# EAGLE board autotest1 (EAGLE 5.07)
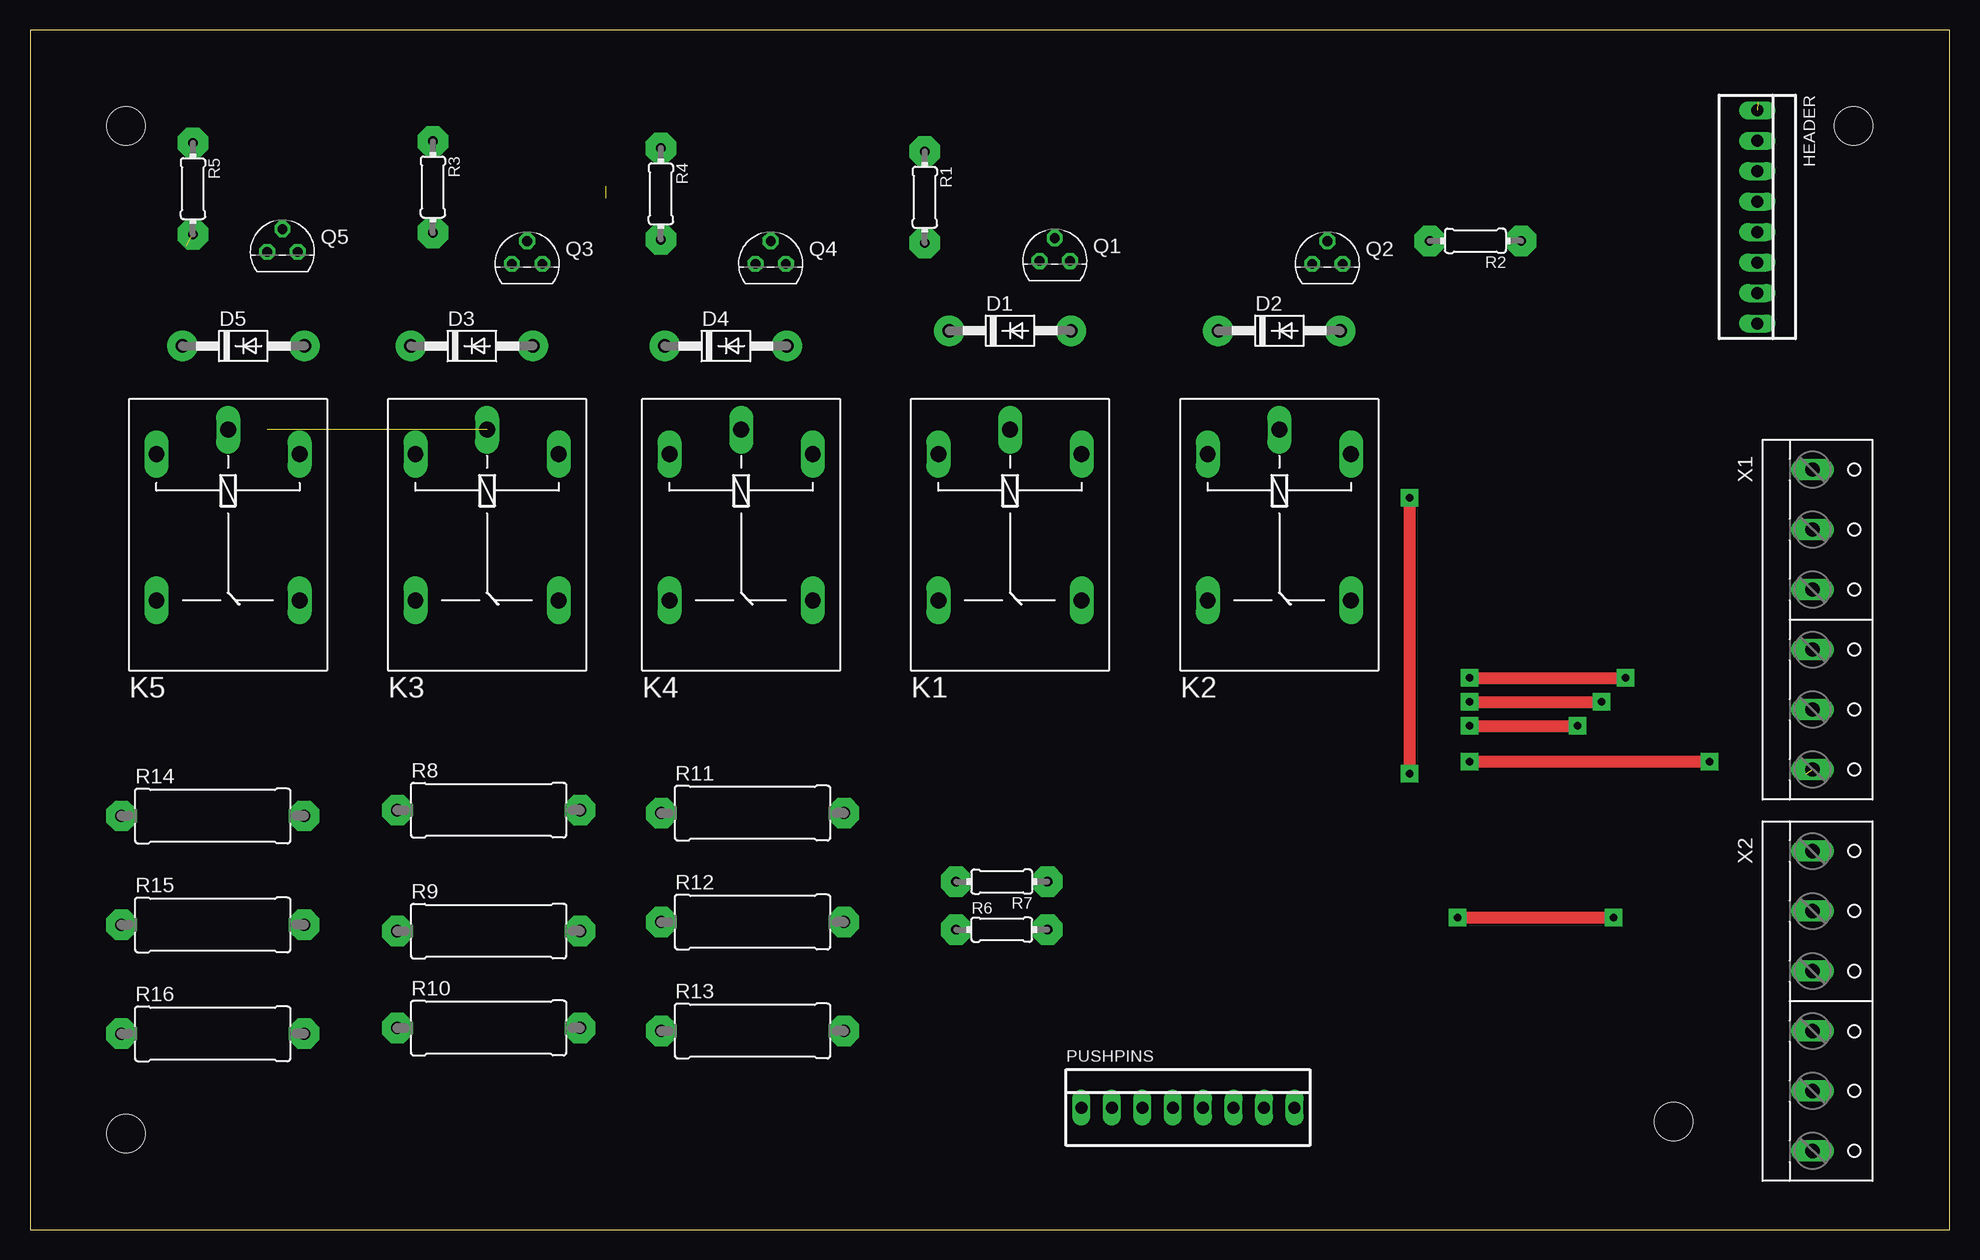
[diagram p0: board, top side]
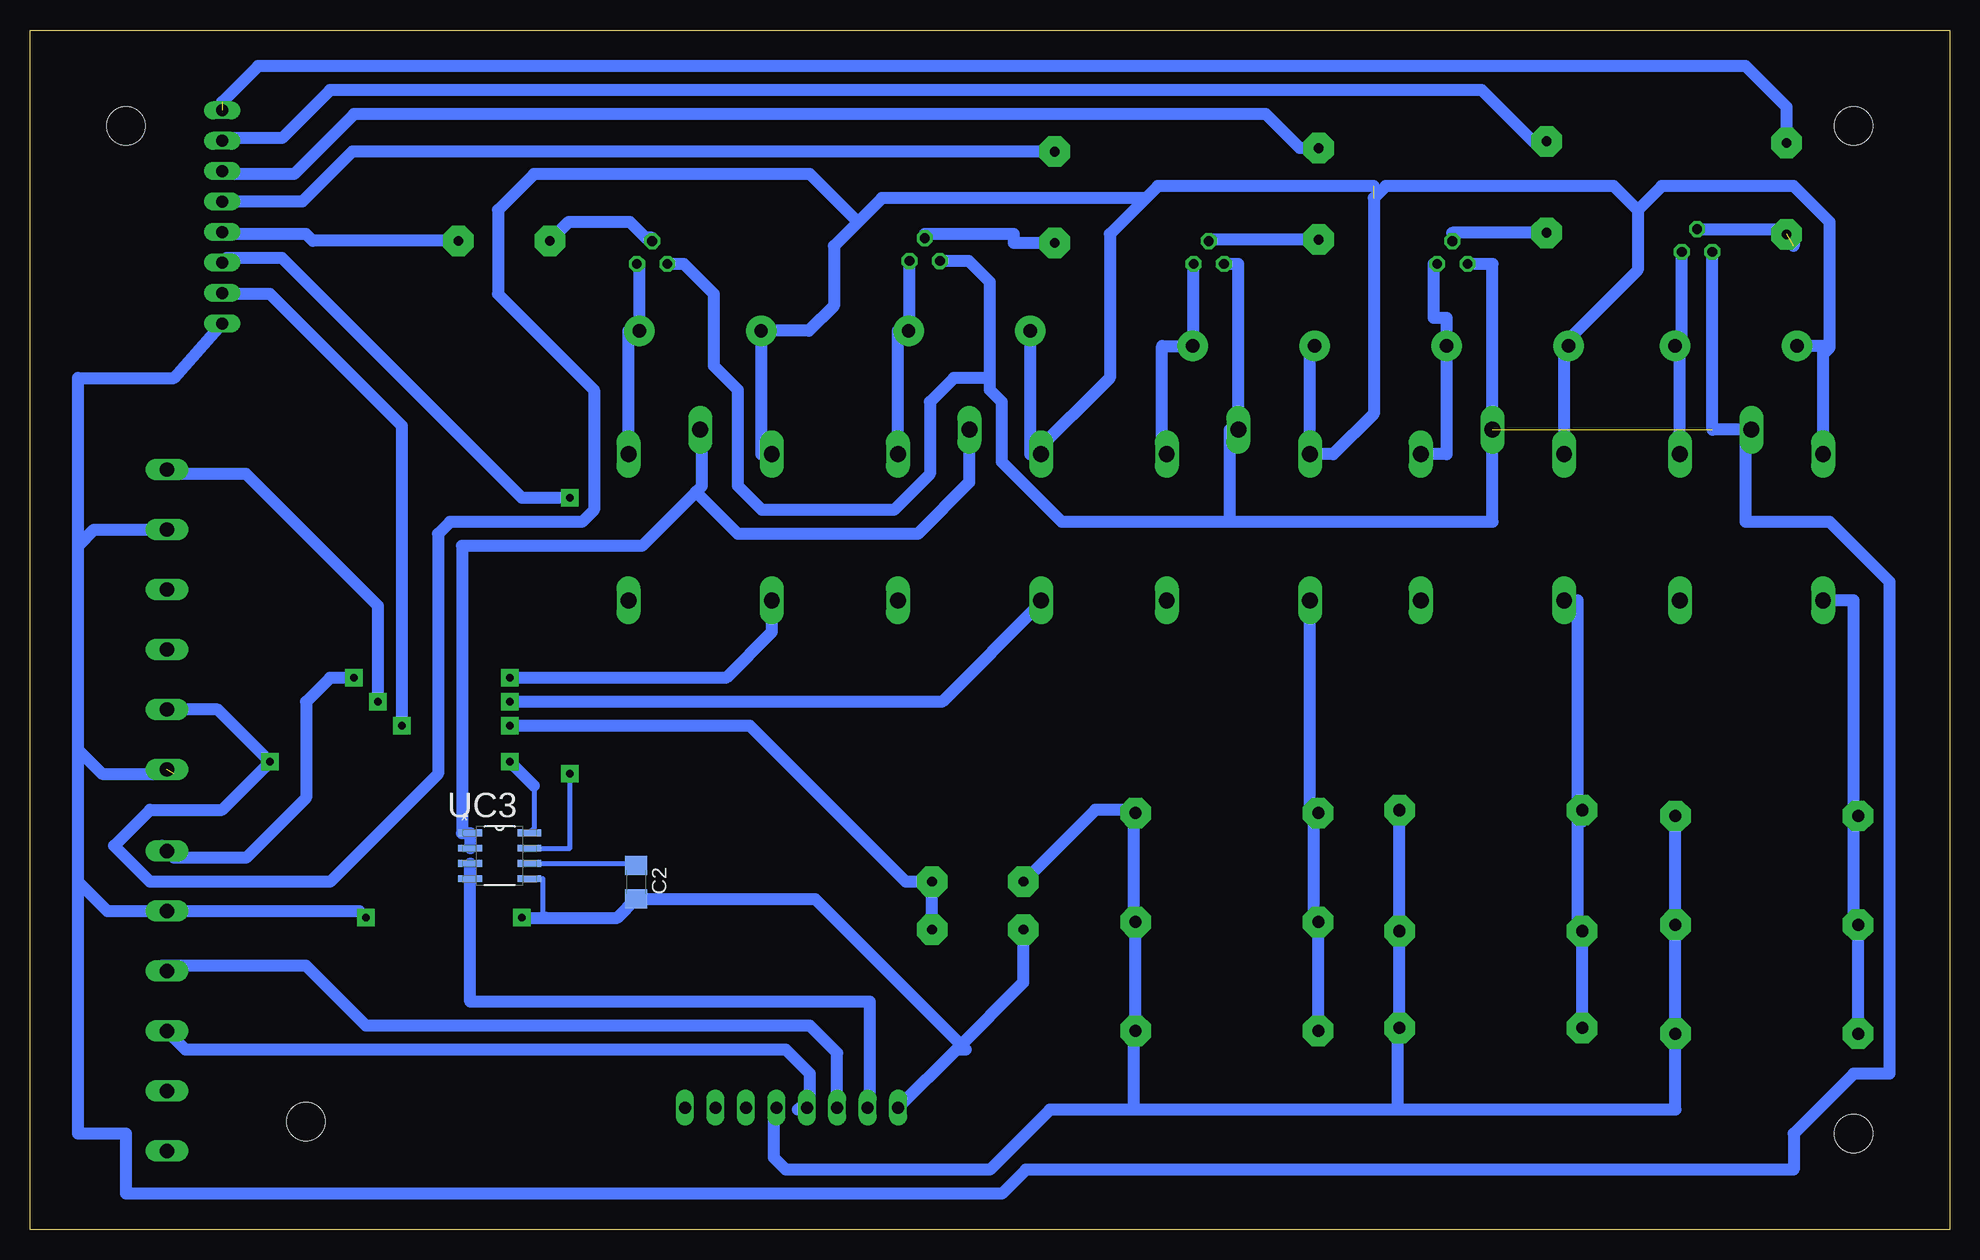
[diagram p1: board, bottom side, seen from below]

Size 160 x 100 mm. Coordinates in mm from the lower left corner, seen from the top.
Outline: 0,0 160,0 160,100 0,100 0,0
Copper layers (1*16): Top 0.035mm / dielectric 1.5mm / Bottom 0.035mm
Design rules "default": minimum track width 10mil, minimum drill 24mil, track to track 8mil, track to pad 8mil, pad to pad 8mil, via to via 8mil, smd to smd 8mil, copper to edge 40mil, drill to drill 8mil, minimum pad ring 10mil, minimum via ring 8mil, stop-mask expansion 4mil, vias tented up to drill 0mil, thermal gap 10mil
Net classes: 1 power: width 3 mm; 2 medpower: width 1 mm
Holes 3.2 mm at 8,92 8,8 137,9 152,92

## Footprints (pad centres in the part's own frame; a part is rotated, then mirrored left to right if it is on the bottom)
C1206 = smd 1.6 x 1.8: 1 -1.4,0; 2 1.4,0
DO41-10 = drill 1.118 pad 2.54 round: A 5.08,0; C -5.08,0
22-23-2081 = drill 1 long: 1 -8.89,0; 2 -6.35,0; 3 -3.81,0; 4 -1.27,0; 5 1.27,0; 6 3.81,0; 7 6.35,0; 8 8.89,0
G5LE = drill 1.321 long: 1 -7.493,-5.969; 2 -7.493,5.969; O 4.699,5.969; P -9.525,0; S 4.699,-5.969
TO92 = drill 0.813 octagon: 1 1.27,0; 2 0,1.905; 3 -1.27,0
0204/7 = drill 0.813 pad 2.54 octagon: 1 -3.81,0; 2 3.81,0
P0613/15 = drill 1.016 pad 2.54 octagon: 1 -7.62,0; 2 7.62,0
SOIC127P600X175-8N = smd 1.981 x 0.559: 1 -2.464,1.905; 2 -2.464,0.635; 3 -2.464,-0.635; 4 -2.464,-1.905; 5 2.464,-1.905; 6 2.464,-0.635; 7 2.464,0.635; 8 2.464,1.905
W237-6 = drill 1.194 long: 1 -12.5,-1.27; 2 -7.5,-1.27; 3 -2.5,-1.27; 4 2.5,-1.27; 5 7.5,-1.27; 6 12.5,-1.27

## Placement (x,y rotation side)
C2  2.2uf  [C1206]  109.48,28.96 270 bottom
D1  1N4004  [DO41-10]  81.69,74.93 0 top
D2  1N4004  [DO41-10]  104.14,74.93 0 top
D3  1N4004  [DO41-10]  36.83,73.66 0 top
D4  1N4004  [DO41-10]  58.01,73.66 0 top
D5  1N4004  [DO41-10]  17.78,73.66 0 top
HEADER  22-23-2081  [22-23-2081]  143.98,84.42 270 top
K1  G5L  [G5LE]  81.69,57.15 270 top
K2  G5L  [G5LE]  104.14,57.15 270 top
K3  G5L  [G5LE]  38.1,57.15 270 top
K4  G5L  [G5LE]  59.28,57.15 270 top
K5  G5L  [G5LE]  16.51,57.15 270 top
PUSHPINS  22-23-2081  [22-23-2081]  96.52,10.16 0 top
Q1  2N3904  [TO92]  85.42,80.74 0 top
Q2  2N3904  [TO92]  108.14,80.5 0 top
Q3  2N3904  [TO92]  41.44,80.5 0 top
Q4  2N3904  [TO92]  61.74,80.5 0 top
Q5  2N3904  [TO92]  21.04,81.5 0 top
R1  [0204/7]  74.58,86.05 270 top
R2  [0204/7]  120.48,82.42 180 top
R3  [0204/7]  33.58,86.91 270 top
R4  [0204/7]  52.58,86.34 270 top
R5  [0204/7]  13.58,86.77 270 top
R6  [0204/7]  81,25 0 top
R7  [0204/7]  81,29 180 top
R8  [P0613/15]  38.23,34.96 0 top
R9  [P0613/15]  38.23,24.88 0 top
R10  [P0613/15]  38.23,16.8 0 top
R11  [P0613/15]  60.23,34.72 0 top
R12  [P0613/15]  60.23,25.64 0 top
R13  [P0613/15]  60.23,16.56 0 top
R14  [P0613/15]  15.23,34.48 0 top
R15  [P0613/15]  15.23,25.4 0 top
R16  [P0613/15]  15.23,16.32 0 top
UC3  ACS712ELCTR-05B-T  [SOIC127P600X175-8N]  120.84,31.15 0 bottom
X1  [W237-6]  149.86,50.85 270 top
X2  [W237-6]  149.86,19.05 270 top

## Library data of the parts
C2 R1-R16 = matt rcl
D1-D5 = matt diode
HEADER PUSHPINS = con-molex
K1-K5 = relay
Q1-Q5 = matt transistor-npn
UC3 = matt-allegro; DESCRIPTION: Linear Current Sensor; MPN: ACS712ELCTR-05B-T; OC_FARNELL: 27M3644; OC_NEWARK: 1329623; PACKAGE: SOIC-8; SUPPLIER: Allegro
X1 X2 = con-wago-500

## Nets
2V-IN: K1.S X1.1
+5V: D1.C D2.C D3.C D4.C D5.C K1.1 K2.1 K3.1 K4.1 K5.1 UC3.8 X1.5
CURRENT_SENSE: HEADER.6 UC3.7
FUELCELL-INPUT: K2.S X2.1
GND: C2.2 HEADER.8 K3.P K4.P K5.P PUSHPINS.1 Q1.3 Q2.3 Q3.3 Q4.3 Q5.3 R6.1 UC3.5 X1.2 X1.6 X2.2
N$1: D1.A K1.2 Q1.1
N$2: Q1.2 R1.2
N$3: D2.A K2.2 Q2.1
N$4: Q2.2 R2.2
N$5: D3.A K3.2 Q3.1
N$6: Q3.2 R3.2
N$7: D4.A K4.2 Q4.1
N$8: Q4.2 R4.2
N$9: D5.A K5.2 Q5.1
N$10: Q5.2 R5.2
N$11: K3.S R8.1 R9.1 R10.1
N$12: C2.1 UC3.6
N$19: K4.S R11.1 R12.1 R13.1
N$20: K5.S R14.1 R15.1 R16.1
OUTPUT_V_SENSE: HEADER.7 R6.2 R7.1
PURGE+ [medpower]: PUSHPINS.3 X2.3
PURGE- [medpower]: PUSHPINS.4 X2.4
RELAY-FC: HEADER.5 R2.1
RELAY-LOAD1: HEADER.2 R3.1
RELAY-LOAD2: HEADER.3 R4.1
RELAY-LOAD3: HEADER.1 R5.1
RELAY-SUPPLY: HEADER.4 R1.1
SHIELD_INPUT [power]: PUSHPINS.2 UC3.3 UC3.4
SHIELD_OUTPUT: PUSHPINS.5 R7.2 R8.2 R9.2 R10.2 R11.2 R12.2 R13.2 R14.2 R15.2 R16.2
SUPPLY [power]: K1.P K2.P UC3.1 UC3.2

## Tracks (layer width: path | path; a pad name or v marks a point on that pad's centre or on a via)
2V-IN  (via drill 0.6 pad 1.42)
  Top 1.016: v120,44 v131,44
  Bottom 1.016: K1.S 75.72,52.28 84,44 v120,44 | v131,44 131,52 142,63 148.24,63 X1.1
+5V  (via drill 0.6 pad 1.42)  (1 unrouted)
  Top 1.016: v140,39 v120,39
  Bottom 0.406: 118,37 118,33.43 UC3.8
  Bottom 1.016: D5.C 10.54,73.66 10.54,73 | K5.1 10.54,73 | K3.1 32.13,73.66 D3.C 31.75,74.25 26,80 26,85 | 76.36,64.64 K1.1 | D1.C 76.61,64.64 76.36,64.64 | D4.C 53.31,73.66 K4.1 51.36,64.64 48,68 48,86 47,87 28,87 26,85 | K2.1 99.06,64.64 D2.C 95.07,74.93 93,77 93,82 91,84 | 26,85 24,87 13,87 10,84 10,73.54 10.54,73 | 76.36,64.64 70,71 70,83 67,86 | 48,87 66,87 67,86 | 91,84 89,86 67,86 | X1.5 144.35,43.35 v140,39 144,35 150,35 153,32 150,29 135,29 126,38 126,58 125,59 114,59 113,60 113,70 121,78 121,85 118,88 95,88 91,84 | v120,39 118,37
CURRENT_SENSE  (via drill 0.6 pad 1.42)
  Top 1.016: v115,38 v115,61
  Bottom 0.406: UC3.7 115,31.79 v115,38
  Bottom 1.016: v115,61 119,61 139,81 143.59,81 HEADER.6
FUELCELL-INPUT  (via drill 0.6 pad 1.42)
  Top 1.016: v120,46 v133,46
  Bottom 1.016: K2.S 98.17,49.83 102,46 v120,46 | v133,46 135,46 137,44 137,36 142,31 148,31 149,32 149,31.96 X2.1
GND  (via drill 0.6 pad 1.42)  (2 unrouted)
  Top 1.016: v132,26 v119,26
  Bottom 0.406: UC3.5 117.25,29.25 117.25,26.25 117,26 | C2.2 110.04,27
  Bottom 1.016: 17,66.67 K5.P | 17,66.67 17,59 10,59 5,54 5,13 8,13 13,8 13,5 77,5 79,3 152,3 152,8 156,8 156,29 | 60,59 60,66.67 K4.P 59.28,80.5 Q4.3 | 60,59 38.1,59 K3.P 38.1,80.5 Q3.3 | 17,66.67 19.77,66.67 Q5.3 | 87.58,10.16 PUSHPINS.1 82.79,15 | R6.1 77.19,20.6 82.79,15 | 82.79,15 82,15 94.56,27.56 C2.2 111.04,26 117,26 v119,26 | X1.2 154.65,58.35 156,57 | 156,40 156,57 | 156,40 154,38 148,38 | 156,29 153.55,26.55 X2.2 132.55,26.55 v132,26 | 156,29 156,40 | Q2.3 105.5,80.5 103,78 103,72 101,70 101,62 99,60 88,60 85,63 85,69 83,71 80,71 | HEADER.8 148,71 156,71 156,57 | Q1.3 81.74,80.74 80,79 80,71 | 80,71 80,70 79,69 79,64 74,59 60,59
N$1
  Bottom 1.016: K1.2 87.66,74.93 D1.A 86.69,74.93 Q1.1
N$2
  Bottom 1.016: R1.2 78,82.24 78,83 85.42,83 Q1.2
N$3
  Bottom 1.016: K2.2 110.11,74.93 D2.A 109.22,80.5 Q2.1
N$4
  Bottom 1.016: Q2.2 108.14,82.67 108.67,82.67 110,84 115.09,84 R2.2
N$5
  Bottom 1.016: K3.2 41.91,64.64 41.91,73 D3.A 41.91,76 43,76 43,80.5 Q3.1
N$6
  Bottom 1.016: R3.2 41.44,83.1 Q3.2
N$7
  Bottom 1.016: K4.2 65.25,63.5 65.63,63.5 65.63,73.66 D4.A 63.01,73.66 Q4.1
N$8
  Bottom 1.016: R4.2 61.74,82.53 Q4.2
N$9
  Bottom 1.016: K5.2 22.48,73.66 D5.A 22.31,73.66 Q5.1
N$10  (1 unrouted)
  Bottom 1.016: Q5.2 13,83.41 13,82
N$11
  Bottom 1.016: K3.S 31,52.45 31,34 | 31,34 30.61,34 R8.1 | 31,34 31,24.88 R9.1 R10.1
N$12
  Bottom 0.406: UC3.6 109.64,30.52 C2.1
N$19
  Bottom 1.016: K4.S 53.31,34.72 R11.1 52.61,35 53,35 53,25.64 R12.1 R13.1
N$20
  Bottom 1.016: K5.S 8,52.45 8,34 | 8,34 7.61,34 R14.1 | 8,34 8,25.4 R15.1 R16.1
OUTPUT_V_SENSE  (via drill 0.6 pad 1.42)
  Top 1.016: v120,42 v129,42
  Bottom 1.016: R6.2 R7.1 87,29 100,42 v120,42 | v129,42 129,67 140,78 143.91,78 HEADER.7
PURGE+
  Bottom 1.016: PUSHPINS.3 92.71,14.71 95,17 132,17 137,22 149,22 149,21.96 X2.3
PURGE-
  Bottom 1.016: PUSHPINS.4 95.41,10 96,10 95,11 95,13 97,15 147.04,15 X2.4
RELAY-FC
  Bottom 1.016: R2.1 136.42,82.42 137,83 143.83,83 HEADER.5
RELAY-LOAD1
  Bottom 1.016: R3.1 34.72,90.72 39,95 135,95 139,91 143.75,91 HEADER.2
RELAY-LOAD2
  Bottom 1.016: R4.1 54.15,90.15 57,93 133,93 138,88 143.75,88 HEADER.3
RELAY-LOAD3  (1 unrouted)
  Bottom 1.016: R5.1 13.58,93.58 17,97 141,97 144,94
RELAY-SUPPLY
  Bottom 1.016: R1.1 133.14,89.86 137.31,85.69 HEADER.4
SHIELD_INPUT
  Bottom 1.016: PUSHPINS.2 90,10.16 90,19 123.3,19 UC3.4 123.3,30 UC3.3
SHIELD_OUTPUT
  Bottom 1.016: R14.2 R15.2 R16.2 22.85,10 46,10 | 68,35 68,25.64 R12.2 R13.2 68,16.56 68,10 | 68,35 67.85,35 R11.2 | R8.2 R9.2 R10.2 46,16.8 46,10 | 46,10 68,10 | 68,35 71.19,35 R7.2 | 68,10 75,10 80,5 97,5 98,6 98,9.95 PUSHPINS.5
SUPPLY
  Bottom 1.016: UC3.2 UC3.1 124,33.05 124,57 109,57 104.5,61.5 | 104.5,61.5 104,62 104,66.53 K2.P | K1.P 81.69,62.31 86,58 101,58 104.5,61.5